# Altium PCB pixel.PcbDoc
Units mil, origin at the board's own origin, x right, y up, seen from the top; angles counter-clockwise.
Board outline 228.35 x 374.02 mil, 2 copper layers (Top Layer, Bottom Layer); 5 components, 5 nets, 14 pads, 12 vias.
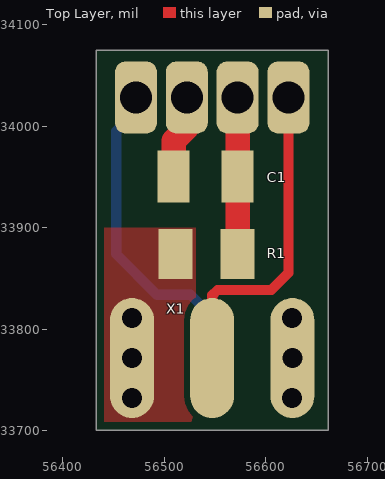
[diagram p0: Top Layer view]
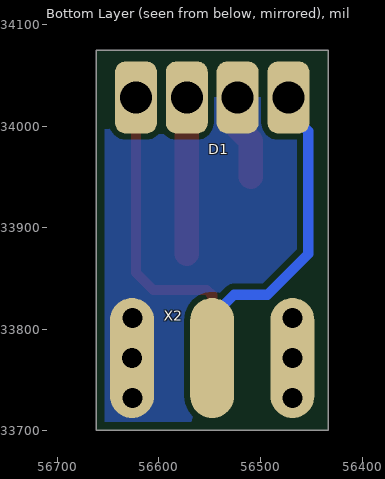
[diagram p1: Bottom Layer view, seen from below]

## Layer stack, top to bottom
Top Solder: solder mask 0.4, Solder Resist, Dk 3.5
Top Layer: signal copper 1.4
Dielectric 1: dielectric 12.6, FR-4, Dk 4.8
Bottom Layer: signal copper 1.4
Bottom Solder: solder mask 0.4, Solder Resist, Dk 3.5

## Board outline
56433.07,33700.79 56661.42,33700.79 56661.42,34074.8 56433.07,34074.8

## Design rules (kind name [scope] priority, off if disabled: settings)
BoardOutlineClearance [All] p1: gap=8
Clearance [All] p1: gap=6
HoleToHoleClearance [All] p1: gap=0 allowstackedmicrovias=TRUE
MinimumSolderMaskSliver [All] p1: minsoldermaskwidth=1
PolygonConnect [All] p1: connectstyle=Direct reliefconductorwidth=10 reliefentries=4 polygonreliefangle="90 Angle" airgapwidth=10
RoutingVias [All] p1: holewidth=12 width=24 viastyle="Through Hole" minholewidth=12 minwidth=24 maxholewidth=100 maxwidth=200
SilkToSilkClearance [False] p1: silktosilkclearance=10
SilkToSolderMaskClearance [False] p1: minsilkscreentomaskgap=10 clearancetoexposedcopper=TRUE
SolderMaskExpansion [All] p1: expansion=4
Width [All] p1: maxlimit=32 minlimit=6 preferedwidth=6 minimp=50.000000 maximp=50.000000 favimp=50.000000
26 further rules are at their usual default settings.

## Components (designator, comment, footprint, x,y, rotation, side; value= is the part's Value field where it differs from the comment)
C1 "Cap" "0805 CAP" 56540.94,33950.22 r0 top
D1 "PL9823" "PL9823 5MM" 56622.44,34028.16 r180 bottom
R1 "Res2" RESC2012X05L 56541.93,33874.21 r180 top
X1 "CON" CON3 56468.5,33771.65 r0 top
X2 "CON" CON3 56468.5,33771.65 r0 bottom

## Footprints (in the part's own frame and the unit in brackets; to place one, negate y for a bottom-side part, rotate by r counter-clockwise, add the part's x,y. Pads: shape width x height; smd on the part's side, far side on the other; paste and mask are expansions set on the pad)
"0805 CAP" [mm] "Chip Capacitor, 2-Leads, Body 2.00x1.25mm, IPC High Density"
  rrect1% 0.8x1.3 smd: 1(-0.8,0) 2(0.8,0)
  body extent -1.1,-0.67 1.1,0.67, height 0.5
CON3 [mm]
  rrect100% 1.1x3 smd paste+0 mask+0: 1(0,0) 2(2.005,0) 3(4.01,0)
"PL9823 5MM" [mm]
  rrect50% 1.05x1.8 hole 0.8 paste+0 mask+0: 1(0,0) 2(1.27,0) 3(2.54,0) 4(3.81,0)
RESC2012X05L [mm] "Chip Resistor, 2-Leads, Body 2.00x1.25mm, IPC High Density"
  rrect1% 0.85x1.25 smd: 1(-0.775,0) 2(0.775,0)
  body extent -1.05,-0.67 1.05,0.67, height 0.5

## Part data
C1: "Capacitor"
R1: "Resistor"

## Via types
v1: diameter 30, hole 20, Top Layer to Bottom Layer, tented both sides, 12 vias

## Nets (pads, with @x,y where several pads share a name; then routed paths per layer and width w, separated by ;. In a path a pad name is that pad's centre, name@x,y a point inside that pad or via, vN(x,y) a via of type N, cw(c..) or ccw(c..) an arc to the next point about the centre after c; other vN are vias at no path point)
DIN: D1.1 X1.2 | length 318.6
  Top Layer w10: X1.2 56547.44,33833.44 56552.61,33838.61 56605.61,33838.61 56622.44,33855.44 D1.1
DOUT: D1.4 X2.2 | length 323
  Bottom Layer w10: D1.4 56472.44,34014.44 56453,33995 56453,33874 56493,33834 56526,33834 56547.44,33812.56 X2.2
GND: C1.1 D1.3 X1.3 X2.3 | length 83.3
  Top Layer w24: C1.1 56509.45,33985.45 56522.44,33998.44 D1.3
  other v1: 56625.98,33732.28 56625.98,33732.28 56626.38,33771.65 56626.38,33771.65 56625.98,33811.02 56625.98,33811.02
NetC1_2: C1.2 D1.2 R1.1 | length 153.9
  Top Layer w24: R1.1 C1.2 D1.2
VCC: R1.2 X1.1 X2.1
  other v1: 56468.5,33732.28 56468.5,33732.28 56468.5,33771.65 56468.5,33771.65 56468.5,33811.02 56468.5,33811.02

## Polygon pours and split planes (outlines as drawn)
GND on Bottom Layer "Bottom Layer-No Net" (solid, remove dead copper, pour order 6): 56659,33704 56659,34028.16 56450,34028.16 56450,33705.2
VCC on Top Layer "VCC_TOP" (solid, pour order 8): 56435,33705 56435,33900 56531,33900 56531,33705

## Silkscreen, mask and mechanical layers (free items; w line width, h text height)
Mechanical 2:
  the board outline again, w4

## Dimensions
56661.42,34074.8 to 56661.42,33700.79 on Mechanical 3
56433.07,34074.8 to 56661.42,34074.8 on Mechanical 3